# EAGLE board daughter-mux (EAGLE 6.6.0)
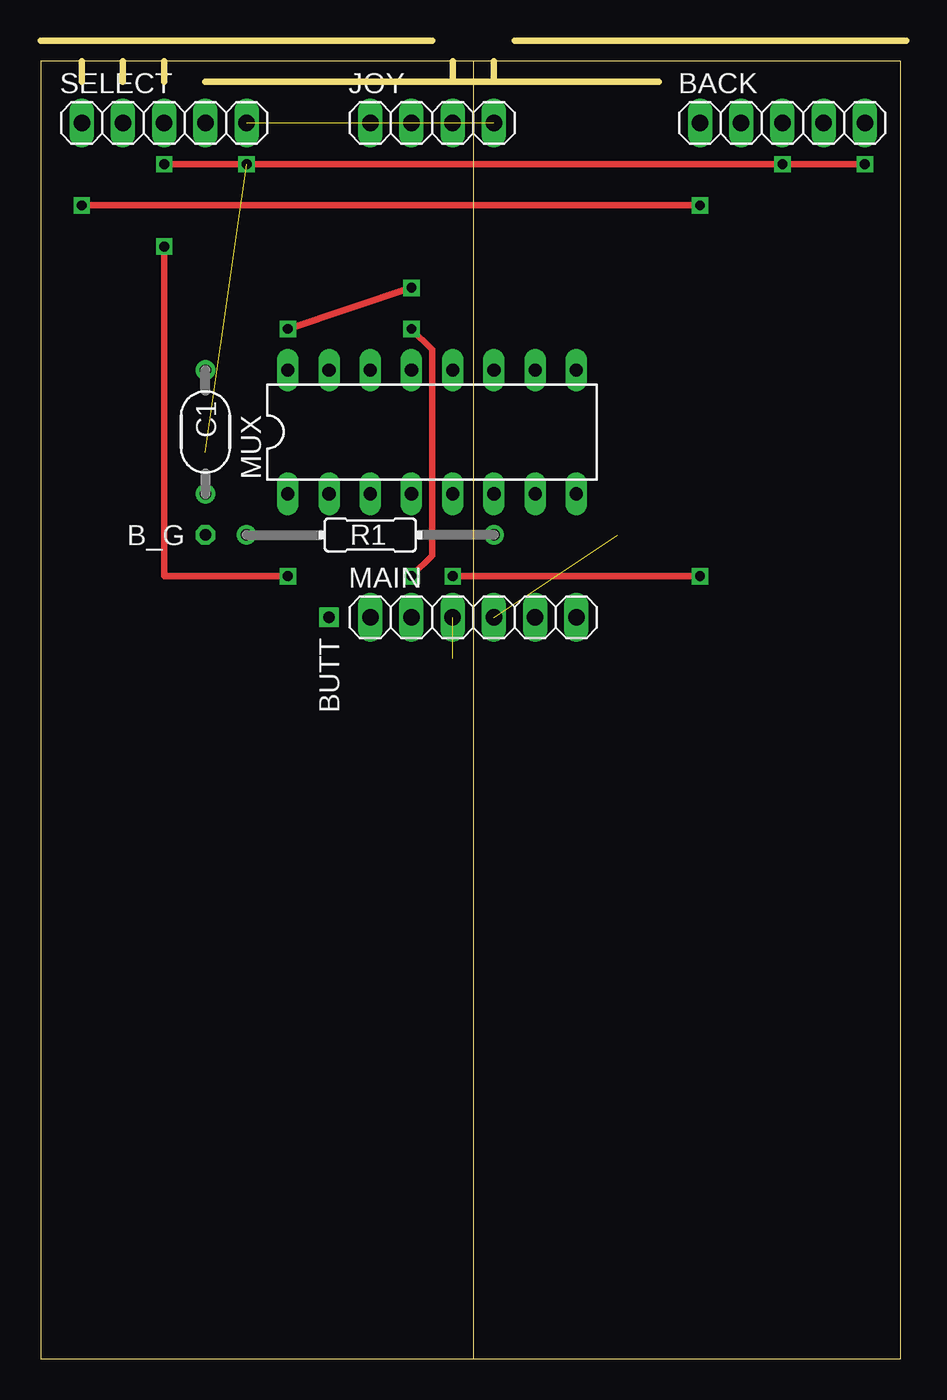
[diagram p0: board, top side]
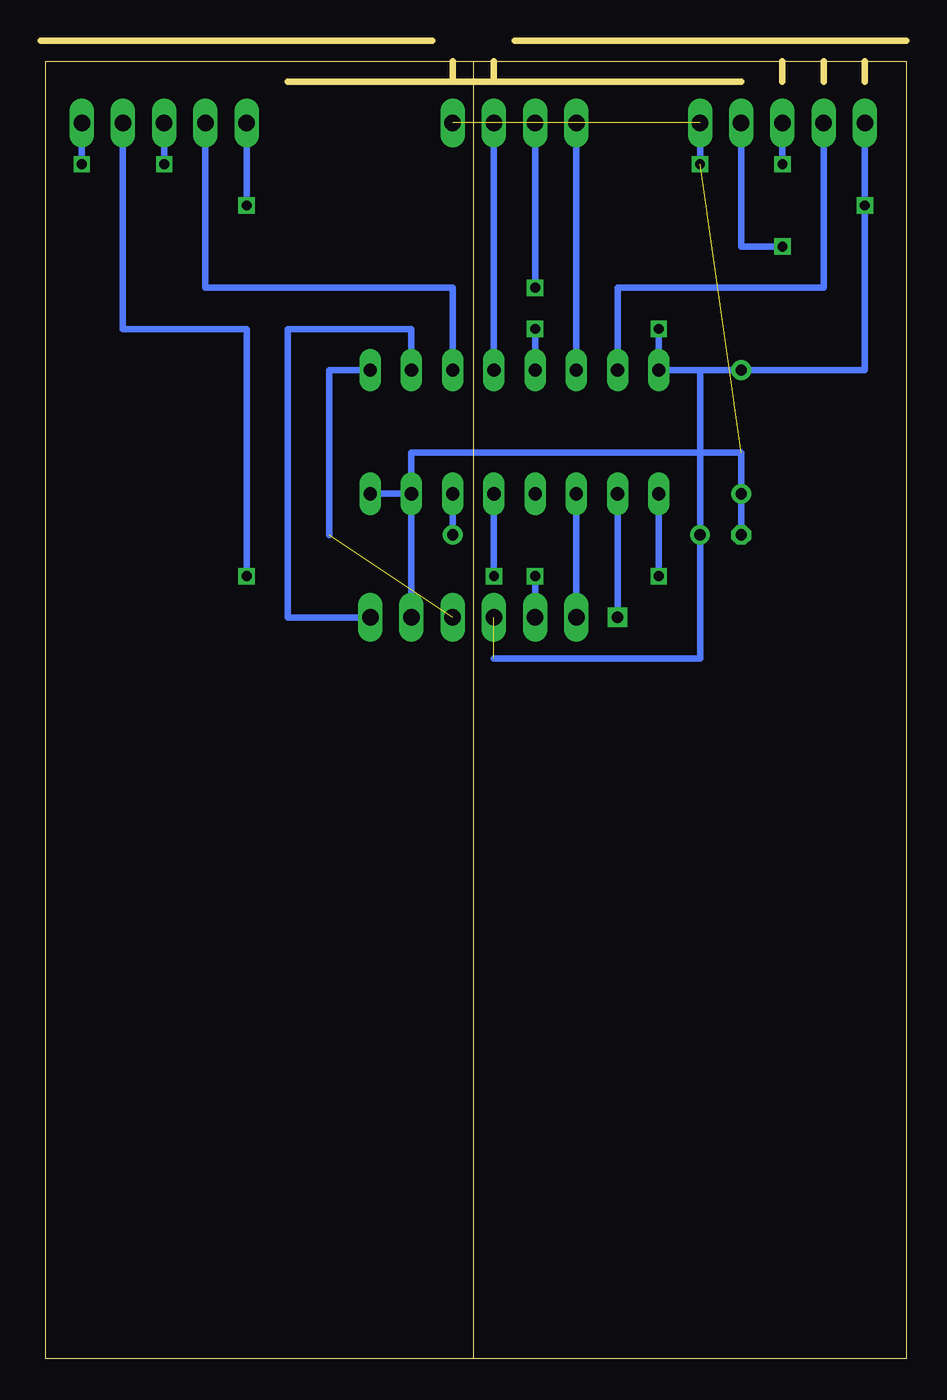
[diagram p1: board, bottom side, seen from below]

Size 53.34 x 81.28 mm. Coordinates in mm from the lower left corner, seen from the top.
Outline: 26.67,0 0,0 0,80 53.01,80 53.01,0 26.67,0
Outline: 2.54,80.01 2.54,78.74
Outline: 5.08,78.74 5.08,80.01
Outline: 7.62,78.74 7.62,80.01
Outline: 10.16,78.74 25.4,78.74
Outline: 25.4,78.74 27.94,78.74
Outline: 27.94,78.74 38.1,78.74
Outline: 27.94,78.74 27.94,80.01
Outline: 25.4,80.01 25.4,78.74
Outline: 0,81.28 24.13,81.28
Outline: 29.21,81.28 53.34,81.28
Outline: 26.67,80.01 26.67,0
Copper layers (1*16): Top 0.035mm / dielectric 1.5mm / Bottom 0.035mm
Design rules "default": minimum track width 10mil, minimum drill 24mil, track to track 8mil, track to pad 8mil, pad to pad 8mil, via to via 8mil, smd to smd 8mil, copper to edge 40mil, drill to drill 8mil, minimum pad ring 10mil, minimum via ring 8mil, stop-mask expansion 4mil, vias tented up to drill 0mil, thermal gap 10mil

## Footprints (pad centres in the part's own frame; a part is rotated, then mirrored left to right if it is on the bottom)
OCTOGON = drill 0.7 octagon: 1 0,0
1X05 = drill 1.016 long: 1 -5.08,0; 2 -2.54,0; 3 0,0; 4 2.54,0; 5 5.08,0
SQUARE = drill 0.7 square: 1 0,0
050X030_050_3 = drill 0.7: 1 -3.81,0; 2 3.81,0
1X04 = drill 1.016 long: 1 -3.81,0; 2 -1.27,0; 3 1.27,0; 4 3.81,0
1X06 = drill 1.016 long: 1 -6.35,0; 2 -3.81,0; 3 -1.27,0; 4 1.27,0; 5 3.81,0; 6 6.35,0
DIL16 = drill 0.813 long: 1 -8.89,-3.81; 2 -6.35,-3.81; 3 -3.81,-3.81; 4 -1.27,-3.81; 5 1.27,-3.81; 6 3.81,-3.81; 7 6.35,-3.81; 8 8.89,-3.81; 9 8.89,3.81; 10 6.35,3.81; 11 3.81,3.81; 12 1.27,3.81; 13 -1.27,3.81; 14 -3.81,3.81; 15 -6.35,3.81; 16 -8.89,3.81
R0207/6 = drill 0.7: 1 -7.62,0; 2 7.62,0

## Placement (x,y rotation side)
B_G  [OCTOGON]  10.16,50.8 180 top
BACK  [1X05]  45.72,76.2 0 top
BUTT  [SQUARE]  17.78,45.72 270 top
C1  100n  [050X030_050_3]  10.16,57.15 270 top
JOY  [1X04]  24.13,76.2 0 top
MAIN  [1X06]  26.67,45.72 0 top
MUX  4052N  [DIL16]  24.13,57.15 0 top
R1  10k  [R0207/6]  20.32,50.8 0 top
SELECT  [1X05]  7.62,76.2 0 top

## Library data of the parts
B_G BUTT = gm-supply
BACK JOY MAIN SELECT = pinhead
C1 = gm-caps-ceramic
MUX = 40xx
R1 = gm-resistors

## Nets
A: MAIN.6 MUX.10
B: MAIN.4 MUX.9
BBACK: BACK.4 MUX.5
BSEL: MUX.1 SELECT.4
BSIDE: BUTT.1 MUX.2
BUTTONS: MAIN.1 MUX.3
GND: B_G.1 BACK.3 BACK.5 C1.2 JOY.4 MAIN.5 MUX.7 MUX.8 SELECT.3 SELECT.5
N$1: MUX.6 R1.2
POTBACK: BACK.2 MUX.11
POTS: MAIN.2 MUX.13
POTSEL: MUX.15 SELECT.2
VA: BACK.1 C1.1 JOY.2 MAIN.3 MUX.16 R1.1 SELECT.1
X: JOY.1 MUX.14
Y: JOY.3 MUX.12

## Tracks (layer width: path | path; a pad name or v marks a point on that pad's centre or on a via)
A
  Bottom 0.406: MUX.10 30.48,63.5 38.1,63.5 38.1,45.72 MAIN.6
B  (1 unrouted)
  Bottom 0.406: MUX.9 35.56,60.96 35.56,50.8
BBACK  (via drill 0.6)
  Top 0.406: v25.4,48.26 v40.64,48.26
  Bottom 0.406: BACK.4 48.26,63.5 40.64,63.5 v40.64,48.26 | MUX.5 v25.4,48.26
BSEL  (via drill 0.6)
  Top 0.406: v7.62,68.58 7.62,48.26 v15.24,48.26
  Bottom 0.406: SELECT.4 10.16,68.58 v7.62,68.58 | v15.24,48.26 MUX.1
BSIDE
  Bottom 0.406: BUTT.1 MUX.2
BUTTONS
  Bottom 0.406: MAIN.1 MUX.3
GND  (via drill 0.6)  (2 unrouted)
  Top 0.406: v7.62,73.66 v12.7,73.66 v45.72,73.66 v50.8,73.66
  Bottom 0.406: MUX.7 MUX.8 | SELECT.3 v7.62,73.66 | v45.72,73.66 BACK.3 | v12.7,73.66 SELECT.5 | BACK.5 v50.8,73.66 | B_G.1 C1.2 10.16,55.88 30.48,55.88 MUX.7 | MAIN.5 MUX.7
N$1
  Bottom 0.406: R1.2 MUX.6
POTBACK
  Bottom 0.406: BACK.2 43.18,66.04 27.94,66.04 MUX.11
POTS  (via drill 0.6)
  Top 0.406: v22.86,63.5 24.13,62.23 24.13,49.53 v22.86,48.26
  Bottom 0.406: MUX.13 v22.86,63.5 | v22.86,48.26 MAIN.2
POTSEL
  Bottom 0.406: SELECT.2 5.08,66.04 17.78,66.04 MUX.15
VA  (via drill 0.6)  (1 unrouted)
  Top 0.406: v40.64,71.12 v2.54,71.12 | v22.86,66.04 v15.24,63.5
  Bottom 0.406: 12.7,60.96 C1.1 2.54,60.96 v2.54,71.12 SELECT.1 | 12.7,60.96 MUX.16 v15.24,63.5 | BACK.1 v40.64,71.12 | 12.7,60.96 R1.1 12.7,43.18 25.4,43.18 | JOY.2 v22.86,66.04
X
  Bottom 0.406: MUX.14 JOY.1
Y
  Bottom 0.406: MUX.12 JOY.3